# Altium PCB 1712.PcbDoc
Units mm, origin at the board's own origin, x right, y up, seen from the top; angles counter-clockwise.
Board outline 98.83 x 137.39 mm, 4 copper layers (ANALOG, GND, POWER, DIGITAL), stack 0.778 mm thick; 20 components, 53 nets, 252 pads, 0 vias.
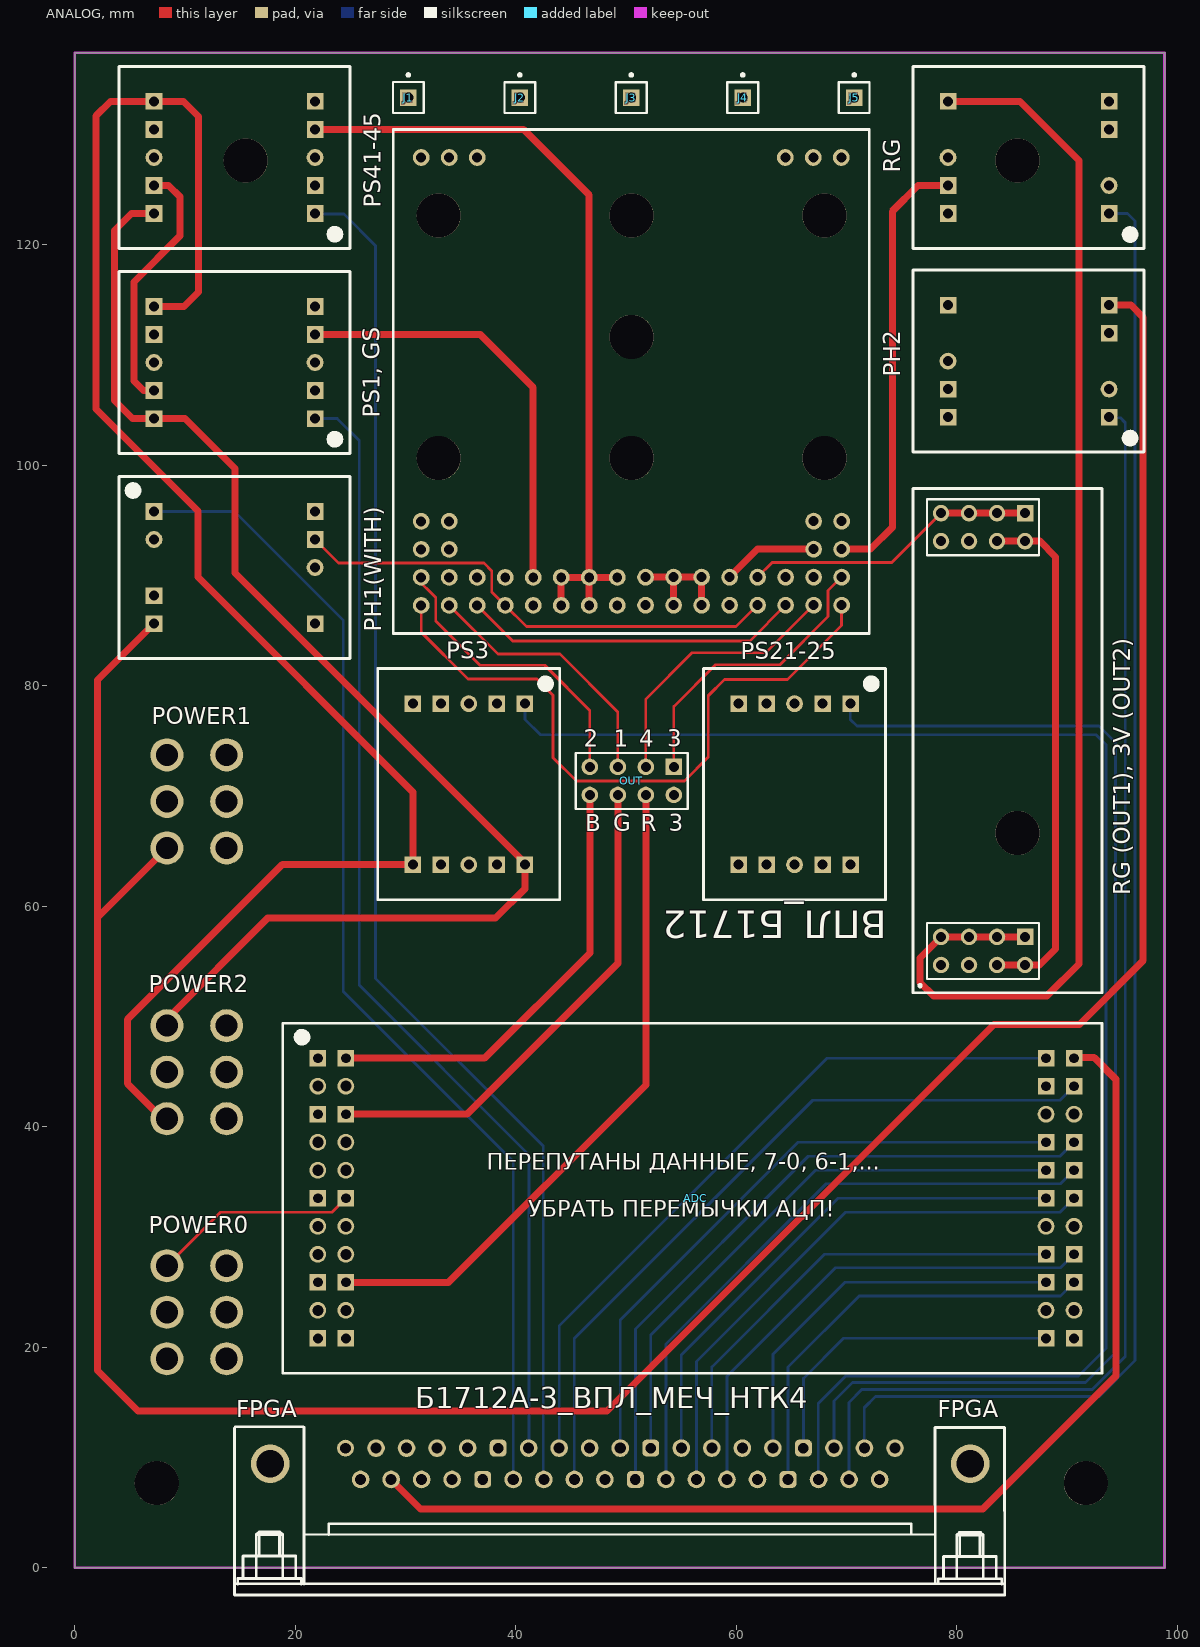
[diagram p0: ANALOG view]
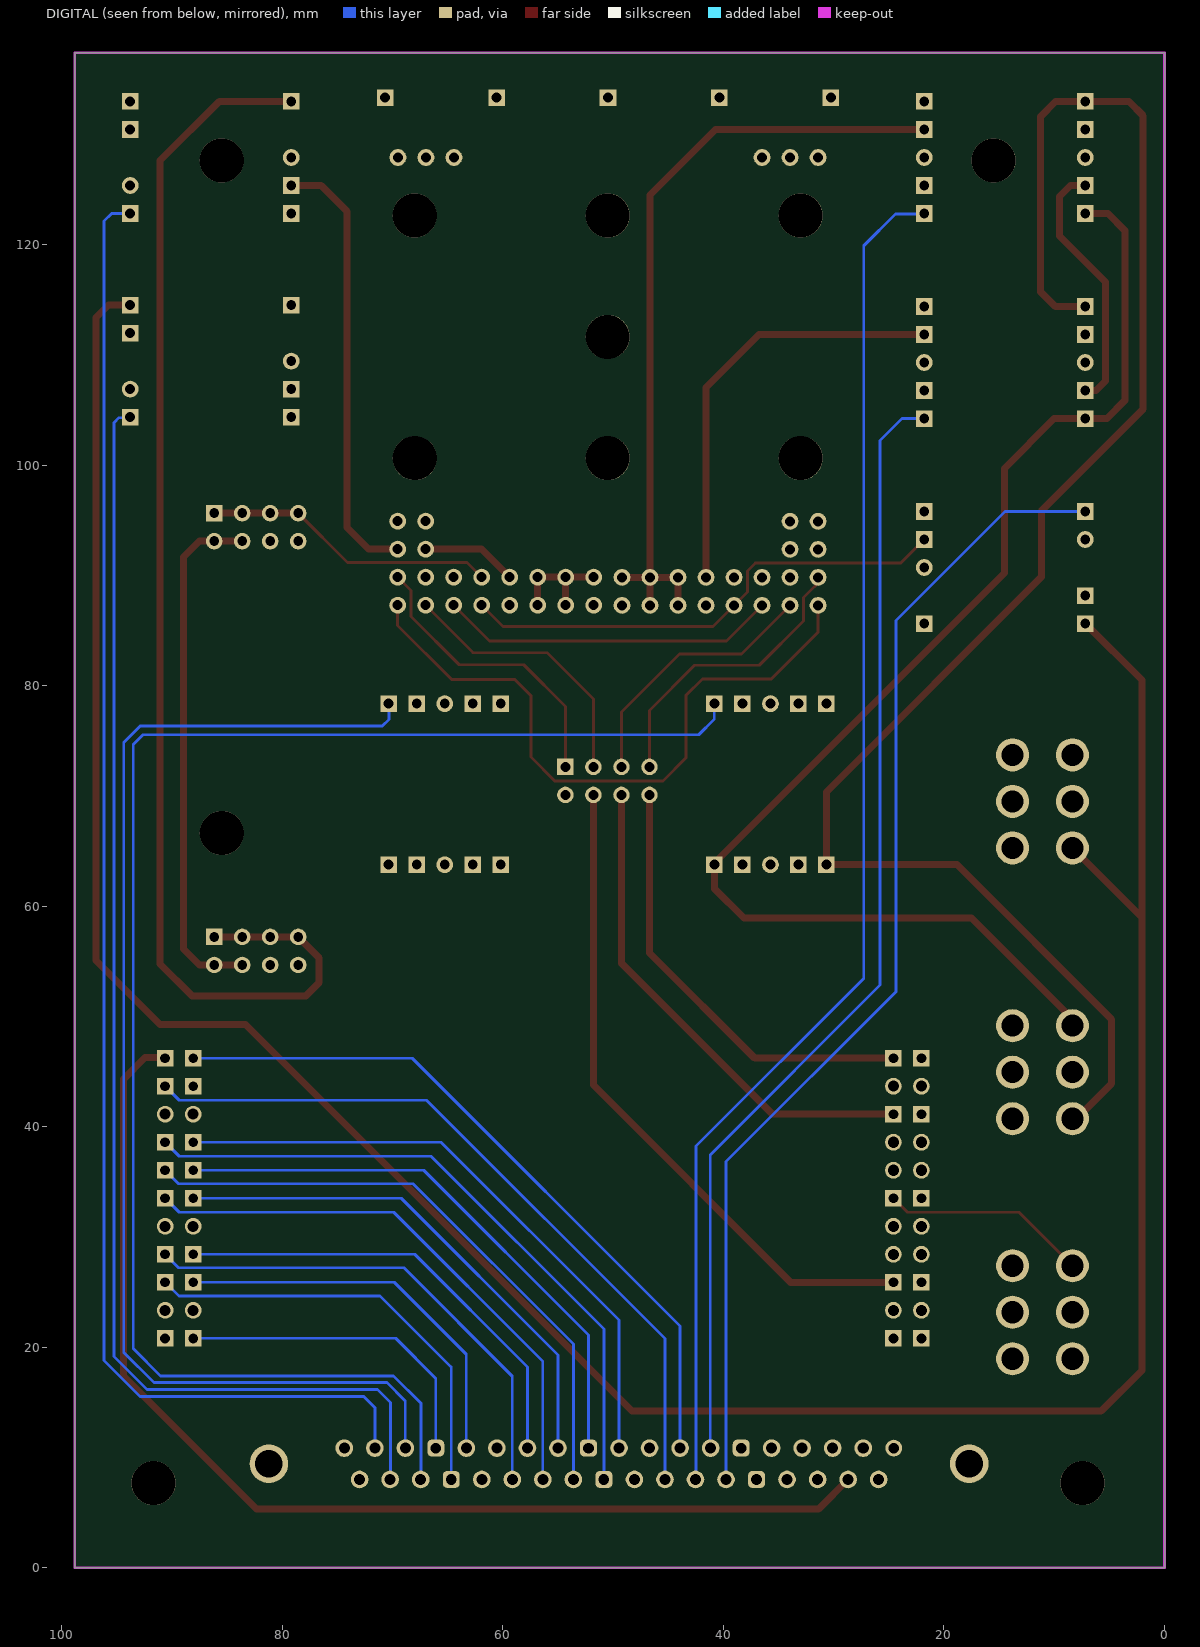
[diagram p1: DIGITAL view, seen from below]
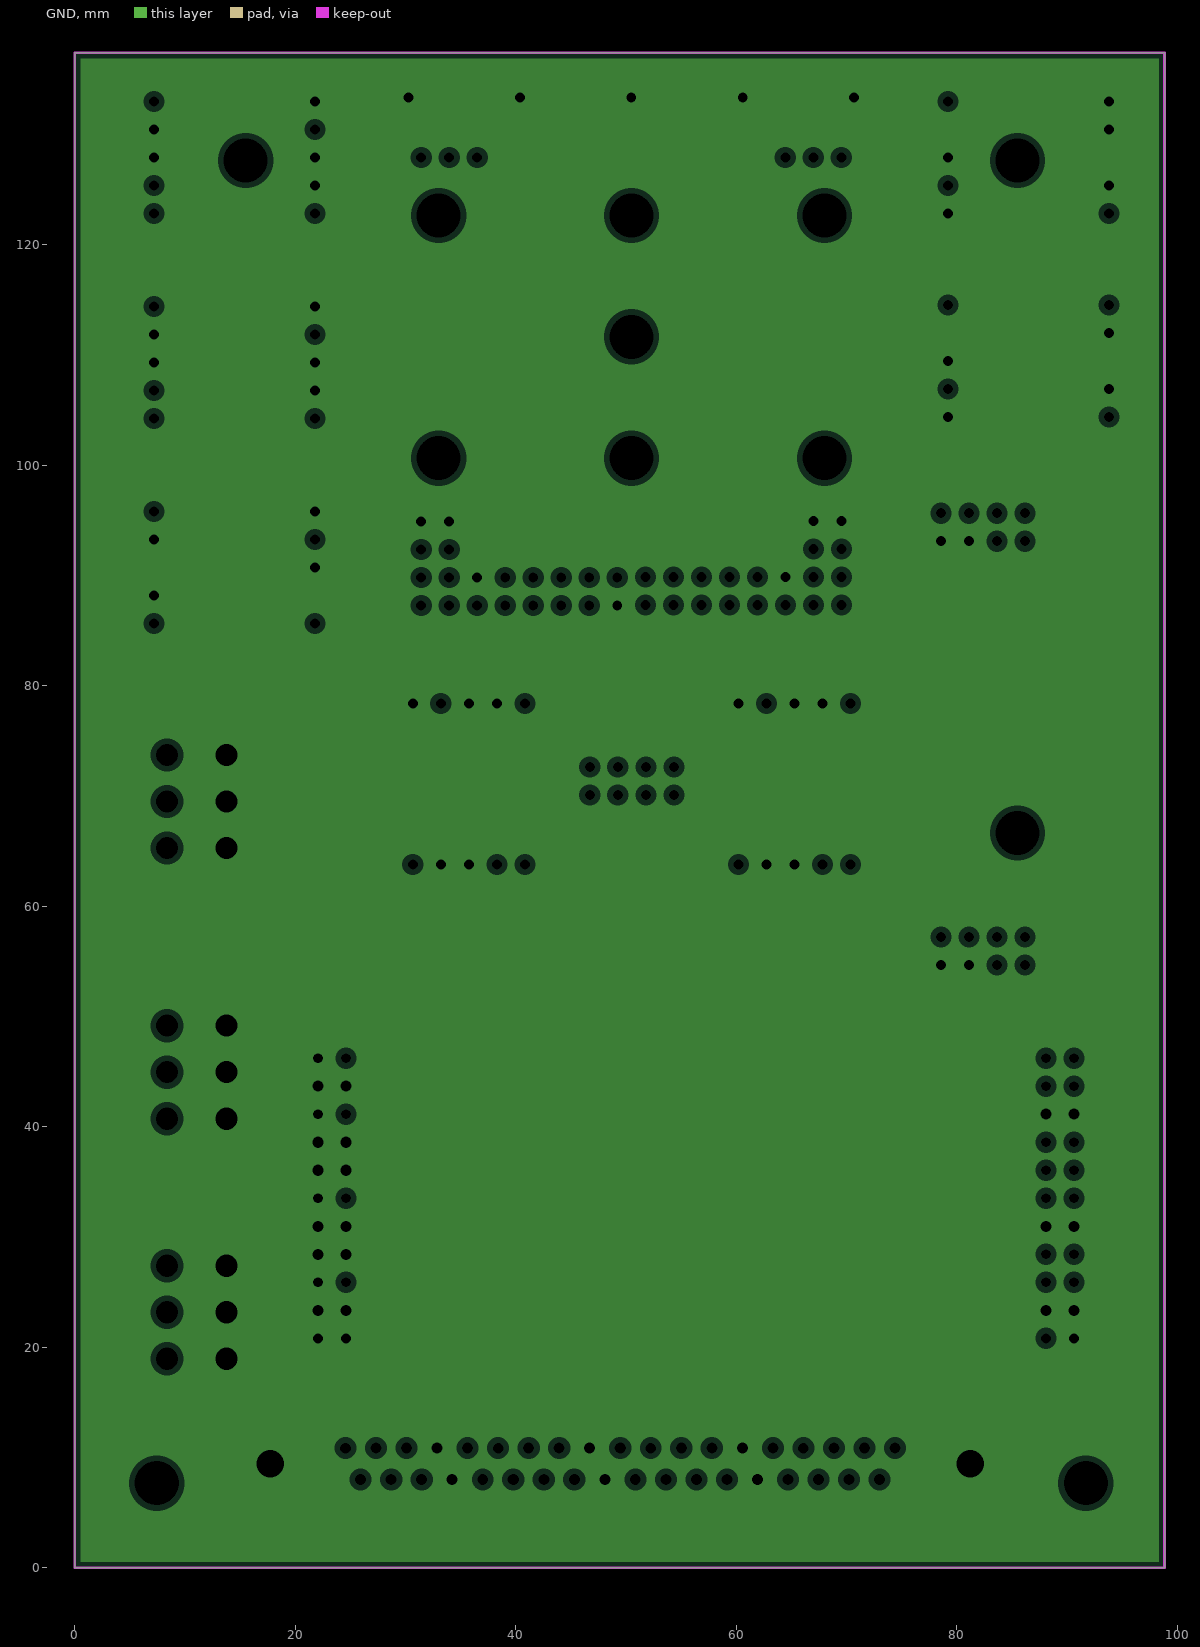
[diagram p2: GND, clearances drawn from the general rule]
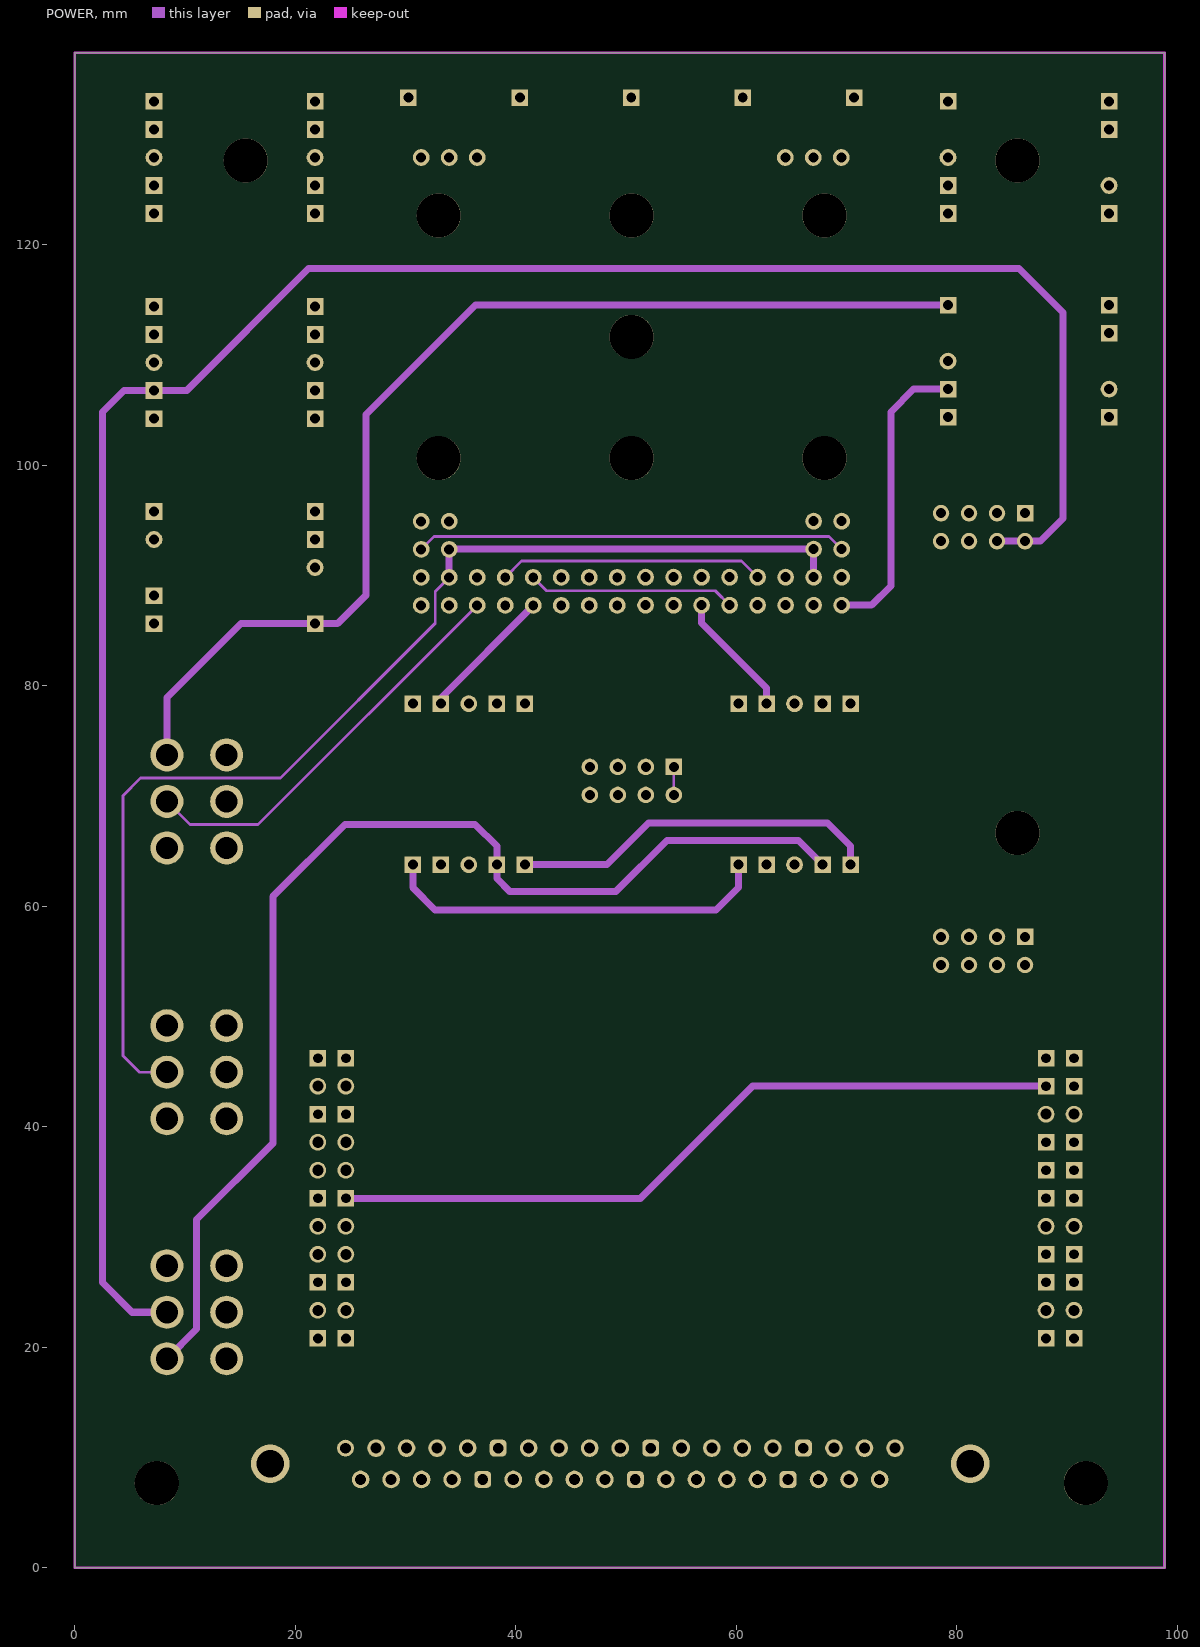
[diagram p3: POWER]

## Layer stack, top to bottom
Top Solder: solder mask 0.0102, Solder Resist, Dk 3.5
ANALOG: signal copper 0.0356
Dielectric 1: core 0.254, FR-4, Dk 4.2
GND: plane copper 0.036, net GND
Dielectric 4: prepreg 0.127, Dk 4.2
POWER: signal copper 0.036
Dielectric 3: core 0.254, Dk 4.2
DIGITAL: signal copper 0.0356
Bottom Solder: solder mask 0.0102, Solder Resist, Dk 3.5

## Board outline
0,0 98.831,0 98.831,137.389 0,137.389

## Design rules (kind name [scope] priority, off if disabled: settings)
Clearance [All] p1: gap=0.254
PlaneClearance [All] p1: clearance=0.508
PlaneConnect [All] p1: planeconnectstyle=Relief reliefexpansion=0.508 reliefentries=4 reliefconductorwidth=0.254 reliefairgap=0.254
PolygonConnect [All] p1: connectstyle=Relief reliefconductorwidth=0.254 reliefentries=4 polygonreliefangle="90 Angle" airgapwidth=0.254
RoutingVias [All] p1: holewidth=0.711 width=1.27 viastyle="Through Hole" minholewidth=0.711 minwidth=1.27 maxholewidth=0.711 maxwidth=1.27
SolderMaskExpansion [All] p1: expansion=0.102
Width [All] p1: maxlimit=2.254 minlimit=0.254 preferedwidth=0.254
27 further rules are at their usual default settings.

## Components (designator, comment, footprint, x,y, rotation, side; value= is the part's Value field where it differs from the comment)
ADC "MEZON_ADC" MEZON_ADC 22.047,46.203 r0 top
FPGA "CHEAP_CON_37_FEMALE" CHEAP_CONN_FEMALE 81.221,9.423 r180 top
J1 "Socket" PIN1 30.253,133.325 r0 top
J2 "Socket" PIN1 40.361,133.322 r0 top
J3 "Socket" PIN1 50.47,133.322 r0 top
J4 "Socket" PIN1 60.578,133.322 r0 top
J5 "Socket" PIN1 70.687,133.322 r0 top
OUT "Header 4X2" HDR2X4 54.331,72.619 r180 top
PH1(WITH) "MEZON_H" MEZON_H 7.188,95.783 r0 top
PH2 "MEZON_H" MEZON_H 93.802,104.343 r180 top
POWER0 "POWER" POWER 15.977,23.165 r90 top
POWER1 "POWER" POWER 15.977,69.494 r90 top
POWER2 "POWER" POWER 15.977,44.933 r90 top
"PS1, GS" "MEZON_V+15" MEZON_V 21.793,104.216 r180 top
PS3 "MEZON_V" MEZON_V 40.818,78.359 r270 top
PS21-25 "MEZON_V" MEZON_V 70.358,78.359 r270 top
PS41-45 "MEZON_V+15" MEZON_V 21.793,122.809 r180 top
RG "MEZON_H" MEZON_H 93.802,122.809 r180 top
"RG (OUT1), 3V (OUT2)" "MEZ_POWER" MEZON_POWER_NEW 78.562,54.661 r90 top
Б1712А-3_ВПЛ_МЕЧ_НТК4 "Б1712А-3" Dzr_place 31.42,127.889 r0 top (schematic designator 1712)

## Footprints (in the part's own frame and the unit in brackets; to place one, negate y for a bottom-side part, rotate by r counter-clockwise, add the part's x,y. Pads: shape width x height; smd on the part's side, far side on the other; paste and mask are expansions set on the pad)
CHEAP_CONN_FEMALE [mm] "CHEAP_CONN_FEMALE"
  round 1.6 hole 1: 1(6.833,-1.422) 2(9.601,-1.422) 3(12.37,-1.422) 5(17.907,-1.422) 6(20.676,-1.422) 7(23.444,-1.422) 8(26.213,-1.422) 10(31.75,-1.422) 11(34.519,-1.422) 12(37.287,-1.422) 13(40.056,-1.422) 15(45.593,-1.422) 16(48.362,-1.422) 17(51.13,-1.422) 18(53.899,-1.422) 20(8.23,1.422) 21(10.998,1.422) 22(13.767,1.422) 24(19.304,1.422) 25(22.073,1.422) 26(24.841,1.422) 27(27.61,1.422) 29(33.147,1.422) 30(35.916,1.422) 31(38.684,1.422) 32(41.453,1.422) 34(46.99,1.422) 35(49.759,1.422) 36(52.527,1.422) 37(55.296,1.422)
  rrect50% 1.524x1.524 hole 0.965: 4(15.138,-1.422) 9(28.981,-1.422) 14(42.824,-1.422) 23(16.535,1.422) 28(30.378,1.422) 33(44.221,1.422)
  round 1.524 hole 0.965: 19(56.667,-1.422)
  round 3.5 hole 2.5: 38(0,0) 39(63.5,0)
  silkscreen extent -3.11,-3.36 66.72,11.92
Dzr_place [mil]
  round 60 hole 35.43: P1(1501.14,-1298.36) P2(1401.14,-1298.36) P15(100,-1299.21) P16(0,-1299.21) R1(1501.14,-1398.36) R2(1401.14,-1398.36) R15(100,-1399.21) R16(0,-1399.21) S1(1501.14,-1498.36) S2(1401.14,-1498.36) S3(1301.14,-1498.36) S4(1201.14,-1498.36) S5(1101.14,-1498.36) S6(1001.14,-1498.36) S7(901.14,-1498.36) S8(801.14,-1498.36) S9(700,-1499.21) S10(600,-1499.21) S11(500,-1499.21) S12(400,-1499.21) S13(300,-1499.21) S14(200,-1499.21) S15(100,-1499.21) S16(0,-1499.21) T1(1501.14,-1598.36) T2(1401.14,-1598.36) T3(1301.14,-1598.36) T4(1201.14,-1598.36) T5(1101.14,-1598.36) T6(1001.14,-1598.36) T7(901.14,-1598.36) T9(700,-1599.21) T10(600,-1599.21) T11(500,-1599.21) T12(400,-1599.21) T13(300,-1599.21) T14(200,-1599.21) T15(100,-1599.21) T16(0,-1599.21) ""(0,0) ""(100,0) ""(200,0) ""(801.14,-1598.36) ""(1300,0) ""(1400,0) ""(1500,0)
  silkscreen extent -100,-1700 1600,100
HDR2X4 [mm] "Connector; Header; 4x2 Position"
  rect 1.5x1.5 hole 0.9: 1(0,0)
  round 1.5 hole 0.9: 2(0,2.54) 3(2.54,0) 4(2.54,2.54) 5(5.08,0) 6(5.08,2.54) 7(7.62,0) 8(7.62,2.54)
  silkscreen extent -1.27,-1.27 8.89,3.81
MEZON_ADC [mm] "MEZON_ADC"
  rect 1.5x1.5 hole 0.9: 1(0,0) 2(2.54,0) 5(0,-5.08) 6(2.54,-5.08) 11(0,-12.7) 12(2.54,-12.7) 17(0,-20.32) 18(2.54,-20.32) 21(0,-25.4) 22(2.54,-25.4) 23(66.04,-25.4) 24(68.58,-25.4) 27(66.04,-20.32) 28(68.58,-20.32) 29(66.04,-17.78) 30(68.58,-17.78) 33(66.04,-12.7) 34(68.58,-12.7) 35(66.04,-10.16) 36(68.58,-10.16) 37(66.04,-7.62) 38(68.58,-7.62) 41(66.04,-2.54) 42(68.58,-2.54) 43(66.04,0) 44(68.58,0)
  round 1.524 hole 1: 3(0,-2.54) 4(2.54,-2.54) 7(0,-7.62) 8(2.54,-7.62) 9(0,-10.16) 10(2.54,-10.16) 13(0,-15.24) 14(2.54,-15.24) 15(0,-17.78) 16(2.54,-17.78) 19(0,-22.86) 20(2.54,-22.86) 25(66.04,-22.86) 26(68.58,-22.86) 31(66.04,-15.24) 32(68.58,-15.24) 39(66.04,-5.08) 40(68.58,-5.08)
  silkscreen extent -3.17,-28.58 71.12,3.17
MEZON_H [mm]
  rect 1.5x1.5 hole 0.9: 1(0,0) 3(0,-7.62) 4(0,-10.16) 5(14.605,-10.16) 7(14.605,-2.54) 8(14.605,0)
  round 1.524 hole 0.9: 2(0,-2.54) 6(14.605,-5.08)
  silkscreen extent -3.17,-13.33 17.78,3.17
MEZON_POWER_NEW [mm]
  round 1.5 hole 0.9: 1(0,0) 1(0,-2.54) 2(0,-5.08) 2(0,-7.62) 3(2.54,-2.54) 3(2.54,0) 3(2.54,-5.08) 4(38.43,-2.54) 4(38.43,0) 5(38.43,-7.62) 5(38.43,-5.08) 6(40.97,-5.08) 6(40.97,-2.54) 6(40.97,0)
  rect 1.5x1.5 hole 0.9: 3(2.54,-7.62) 6(40.97,-7.62)
  silkscreen extent -2.51,-14.6 43.21,2.54
MEZON_V [mm]
  rect 1.5x1.5 hole 0.9: 1(0,0) 2(0,-2.54) 4(0,-7.62) 5(0,-10.16) 6(14.605,-10.16) 7(14.605,-7.62) 9(14.605,-2.54) 10(14.605,0)
  round 1.524 hole 0.9: 3(0,-5.08) 8(14.605,-5.08)
  silkscreen extent -3.18,-13.33 17.78,3.18
PIN1 [mm] "Connector; Plug"
  rect 1.5x1.5 hole 0.9: 1(0,0)
  silkscreen extent -1.4,-1.4 1.4,2.17
POWER [mm] "POWER"
  round 3 hole 2: 1(4.217,7.62) 2(0,7.62) 3(-4.217,7.62) 4(4.217,2.198) 5(0,2.198) 6(-4.217,2.198)

## Part data
OUT: "Header, 4-Pin, Dual row"
"PS1, GS" PS41-45: library part MEZON_V_+15
"RG (OUT1), 3V (OUT2)": library part MEZON_POWER_NEW

## Free pads (board coordinates)
  round 4 hole 4 unplated mask+0: 0(7.442,7.671) 0(15.5,127.623) 0(33,100.623) 0(33,122.623) 0(50.5,100.623) 0(50.5,111.623) 0(50.5,122.623) 0(68,100.623) 0(68,122.623) 0(85.5,66.623) 0(85.5,127.623) 0(91.694,7.671)

## Nets (pads, with @x,y where several pads share a name; then routed paths per layer and width w, separated by ;. In a path a pad name is that pad's centre, name@x,y a point inside that pad or via, vN(x,y) a via of type N, cw(c..) or ccw(c..) an arc to the next point about the centre after c; other vN are vias at no path point)
1V: "PS1, GS.10" POWER2.1 PS3.10 PS21-25.10 PS41-45.10 | length 153.8
  ANALOG w0.635: PS41-45.10 5.131,122.809 3.607,121.285 3.607,105.842 5.232,104.216 7.188,104.216 10.008,104.216 14.529,99.695 14.529,90.195 40.818,63.906 PS3.10 40.818,61.57 38.151,58.903 17.501,58.903 8.357,49.759 POWER2.1
  POWER w0.635: PS3.10 48.26,63.754 52.045,67.539 68.25,67.539 70.358,65.43 PS21-25.10
3V: "RG (OUT1), 3V (OUT2).6" Б1712А-3_ВПЛ_МЕЧ_НТК4.S4 Б1712А-3_ВПЛ_МЕЧ_НТК4.S13 | length 50.8
  ANALOG w0.254: Б1712А-3_ВПЛ_МЕЧ_НТК4.S4 63.259,91.161 74.092,91.161 78.562,95.631
  ANALOG w0.635: 78.562,95.631 81.102,95.631 83.642,95.631 86.182,95.631
  POWER w0.254: Б1712А-3_ВПЛ_МЕЧ_НТК4.S13 40.518,91.288 60.472,91.288 Б1712А-3_ВПЛ_МЕЧ_НТК4.S4
4V: PH1(WITH).5 PH2.5 POWER1.1 | length 100.4
  POWER w0.635: POWER1.1 8.357,78.918 15.062,85.623 21.793,85.623 23.851,85.623 26.416,88.189 26.416,104.572 36.347,114.503 PH2.5
-15V: POWER0.3 PS3.9 PS21-25.9 | length 105.5
  POWER w0.635: POWER0.3 11.049,21.64 11.049,31.572 17.958,38.481 17.958,60.858 24.511,67.412 36.297,67.412 38.278,65.43 PS3.9 38.278,62.484 39.421,61.341 49.098,61.341 53.696,65.938 65.634,65.938 PS21-25.9
ADCCLK: ADC.27 FPGA.5 | length 36
  DIGITAL w0.254: FPGA.5 63.322,10.854 63.322,19.355 69.85,25.883 ADC.27
CDSCLK1: ADC.23 FPGA.4 | length 29.8
  DIGITAL w0.254: FPGA.4 66.091,10.854 66.091,17.17 69.723,20.803 ADC.23
CDSCLK2: ADC.28 FPGA.23 | length 39.3
  DIGITAL w0.254: FPGA.23 64.694,8.009 64.694,18.186 71.145,24.638 89.383,24.638 ADC.28
D0: ADC.30 FPGA.25 | length 45.4
  DIGITAL w0.254: FPGA.25 59.148,17.365 68.986,27.203 89.408,27.203 ADC.30
D1: ADC.29 FPGA.7 | length 41.9
  DIGITAL w0.254: FPGA.7 57.777,18.204 67.996,28.423 ADC.29
D2: ADC.34 FPGA.26 | length 51.1
  DIGITAL w0.254: FPGA.26 56.38,18.712 69.901,32.233 89.357,32.233 ADC.34
D3: ADC.33 FPGA.8 | length 47.4
  DIGITAL w0.254: FPGA.8 55.008,19.296 69.215,33.503 ADC.33
D4: ADC.36 FPGA.27 | length 55.8
  DIGITAL w0.254: FPGA.27 53.611,20.286 68.148,34.823 89.408,34.823 ADC.36
D5: ADC.35 FPGA.9 | length 52.3
  DIGITAL w0.254: FPGA.9 52.24,21.099 67.183,36.043 ADC.35
D6: ADC.38 FPGA.28 | length 60.4
  DIGITAL w0.254: FPGA.28 50.843,21.633 66.523,37.313 89.357,37.313 ADC.38
D7: ADC.37 FPGA.10 | length 56.9
  DIGITAL w0.254: FPGA.10 49.471,22.445 65.608,38.583 ADC.37
GND: "PS1, GS.2" "PS1, GS.3" "PS1, GS.5" "PS1, GS.7" "PS1, GS.8" "RG (OUT1), 3V (OUT2).1" "RG (OUT1), 3V (OUT2).4" ADC.1 ADC.3 ADC.4 ADC.5 ADC.7 ADC.8 ADC.9 ADC.10 ADC.11 ADC.13 ADC.14 ADC.15 ADC.16 ADC.17 ADC.19 ADC.20 ADC.21 ADC.22 ADC.24 ADC.25 ADC.26 ADC.31 ADC.32 ADC.39 ADC.40 FPGA.6 FPGA.11 FPGA.16 FPGA.24 FPGA.29 FPGA.34 FPGA.38 FPGA.39 J1.1 J2.1 J3.1 J4.1 J5.1 PH1(WITH).2 PH1(WITH).3 PH1(WITH).6 PH1(WITH).8 PH2.2 PH2.3 PH2.6 PH2.8 POWER0.4 POWER0.5 POWER0.6 POWER1.4 POWER1.5 POWER1.6 POWER2.4 POWER2.5 POWER2.6 PS3.2 PS3.3 PS3.5 PS3.7 PS3.8 PS21-25.2 PS21-25.3 PS21-25.5 PS21-25.7 PS21-25.8 PS41-45.2 PS41-45.3 PS41-45.5 PS41-45.7 PS41-45.8 RG.2 RG.3 RG.4 RG.6 RG.8 Б1712А-3_ВПЛ_МЕЧ_НТК4.P1 Б1712А-3_ВПЛ_МЕЧ_НТК4.P2 Б1712А-3_ВПЛ_МЕЧ_НТК4.P15 Б1712А-3_ВПЛ_МЕЧ_НТК4.P16 Б1712А-3_ВПЛ_МЕЧ_НТК4.S3 Б1712А-3_ВПЛ_МЕЧ_НТК4.S14 Б1712А-3_ВПЛ_МЕЧ_НТК4.T9
GS_PS1: "PS1, GS.4" Б1712А-3_ВПЛ_МЕЧ_НТК4.S12 Б1712А-3_ВПЛ_МЕЧ_НТК4.T5 | length 57.9
  ANALOG w0.635: 21.793,111.836 36.779,111.836 41.58,107.036 Б1712А-3_ВПЛ_МЕЧ_НТК4.S12
  POWER w0.254: Б1712А-3_ВПЛ_МЕЧ_НТК4.S12 42.794,88.595 58.084,88.595 Б1712А-3_ВПЛ_МЕЧ_НТК4.T5
OUT1: OUT.5 Б1712А-3_ВПЛ_МЕЧ_НТК4.T15 | length 24.3
  ANALOG w0.254: Б1712А-3_ВПЛ_МЕЧ_НТК4.T15 38.374,82.855 43.993,82.855 49.251,77.597 OUT.5
OUT2: OUT.7 Б1712А-3_ВПЛ_МЕЧ_НТК4.S16 | length 27.7
  ANALOG w0.254: Б1712А-3_ВПЛ_МЕЧ_НТК4.S16 30.906,89.809 32.741,87.975 32.741,85.852 36.754,81.839 42.621,81.839 46.711,77.749 OUT.7
OUT3: OUT.1 OUT.2 Б1712А-3_ВПЛ_МЕЧ_НТК4.S1 | length 29.5
  ANALOG w0.254: OUT.1 54.331,78.105 58.115,81.89 63.957,81.89 68.326,86.258 68.326,88.608 Б1712А-3_ВПЛ_МЕЧ_НТК4.S1
  POWER w0.254: OUT.2 OUT.1
OUT4: OUT.3 Б1712А-3_ВПЛ_МЕЧ_НТК4.T2 | length 24.9
  ANALOG w0.254: OUT.3 51.791,78.765 56.007,82.982 62.7,82.982 Б1712А-3_ВПЛ_МЕЧ_НТК4.T2
P0.0: FPGA.15
P0.1: FPGA.33
P0.2: FPGA.14
P0.3: FPGA.32 PH1(WITH).1 | length 105.5
  DIGITAL w0.254: 7.188,95.783 14.478,95.783 24.359,85.903 24.359,52.232 39.768,36.823 FPGA.32
P0.4: "PS1, GS.1" FPGA.13 | length 102.6
  DIGITAL w0.254: 21.793,104.216 23.8,104.216 25.806,102.21 25.806,52.832 41.199,37.44 41.199,10.879 FPGA.13
P0.5: FPGA.31 PS41-45.1 | length 124.9
  DIGITAL w0.254: PS41-45.1 21.844,122.758 24.409,122.758 27.28,119.888 27.28,53.442 42.494,38.228 42.494,8.044 FPGA.31
P2.3: FPGA.22 PS3.1 | length 144.9
  DIGITAL w0.254: PS3.1 40.843,78.334 40.843,76.937 42.24,75.54 92.627,75.54 93.523,74.643 93.523,19.878 91.039,17.394 69.921,17.394 67.437,14.91 67.437,8.018 FPGA.22
P2.4: FPGA.3 PS21-25.1 | length 113.3
  DIGITAL w0.254: FPGA.3 68.859,10.854 68.859,15.113 70.529,16.783 91.65,16.783 94.386,19.52 94.386,74.828 92.888,76.327 70.942,76.327 70.333,76.937 70.333,78.334 PS21-25.1
P2.5: FPGA.21 PH2.1 | length 120.2
  DIGITAL w0.254: FPGA.21 70.206,8.018 70.206,14.986 71.374,16.154 92.278,16.154 95.275,19.152 95.275,103.835 94.818,104.292 93.853,104.292 PH2.1
P2.6: FPGA.2 RG.1 | length 136
  DIGITAL w0.254: FPGA.2 71.603,10.863 71.603,14.503 72.625,15.526 92.907,15.526 96.164,18.783 96.164,122.123 95.479,122.809 RG.1 RG.1@93.828,122.784
P2.7: FPGA.20
PFI2: FPGA.17
PFI3: FPGA.35
PH1: PH1(WITH).7 Б1712А-3_ВПЛ_МЕЧ_НТК4.T4 Б1712А-3_ВПЛ_МЕЧ_НТК4.T13 | length 45.3
  ANALOG w0.254: 21.793,93.243 23.927,91.11 37.109,91.11 37.821,90.399 37.821,88.488 Б1712А-3_ВПЛ_МЕЧ_НТК4.T13 40.965,85.344 59.982,85.344 Б1712А-3_ВПЛ_МЕЧ_НТК4.T4
PH2: PH2.7 Б1712А-3_ВПЛ_МЕЧ_НТК4.T1 Б1712А-3_ВПЛ_МЕЧ_НТК4.T16 | length 87.4
  ANALOG w0.254: Б1712А-3_ВПЛ_МЕЧ_НТК4.T16 31.42,84.836 35.662,80.594 41.91,80.594 43.383,79.121 43.383,73.457 45.491,71.349 55.296,71.349 57.455,73.508 57.455,79.07 58.928,80.543 64.643,80.543 69.549,85.449 Б1712А-3_ВПЛ_МЕЧ_НТК4.T1
  POWER w0.635: Б1712А-3_ВПЛ_МЕЧ_НТК4.T1 72.279,87.291 74.016,89.027 74.016,104.826 76.073,106.883 PH2.7
POWER_ADC: ADC.12 ADC.41 POWER0.1 | length 86.5
  ANALOG w0.254: POWER0.1 13.207,32.233 23.317,32.233 ADC.12
  POWER w0.635: ADC.12 51.308,33.503 61.468,43.663 ADC.41
POWER_PH_LOW: PH1(WITH).4 PH2.4 POWER1.3 | length 254.7
  ANALOG w0.635: 7.188,85.623 2.057,80.493 2.057,58.978 ; POWER1.3@7.57,65.277 POWER1.3 2.057,58.978 ; PH2.4 95.783,114.503 96.901,113.386 96.901,55.067 91.11,49.276 83.363,49.276 48.285,14.199 5.74,14.199 2.057,17.882 2.057,58.978
POWER_PS_LOW: "PS1, GS.6" POWER2.3 PS3.6 PS21-25.6 PS41-45.6 | length 188.5
  ANALOG w0.635: 7.188,114.376 9.906,114.376 11.227,115.697 11.227,131.623 9.881,132.969 PS41-45.6 3.226,132.969 1.93,131.674 1.93,105.08 11.176,95.834 11.176,89.84 30.658,70.358 PS3.6 18.821,63.754 4.801,49.733 4.801,43.891 7.977,40.715 POWER2.3
  POWER w0.635: PS3.6 30.658,61.671 32.69,59.639 58.141,59.639 60.198,61.697 PS21-25.6
POWER_RD: POWER1.2 Б1712А-3_ВПЛ_МЕЧ_НТК4.T3 Б1712А-3_ВПЛ_МЕЧ_НТК4.T14 | length 67.9
  ANALOG w0.254: Б1712А-3_ВПЛ_МЕЧ_НТК4.T14 39.72,84.049 61.227,84.049 Б1712А-3_ВПЛ_МЕЧ_НТК4.T3
  POWER w0.254: POWER1.2 10.465,67.386 16.617,67.386 Б1712А-3_ВПЛ_МЕЧ_НТК4.T14
POWER_RG: "RG (OUT1), 3V (OUT2).3" RG.5 | length 115.6
  ANALOG w0.635: RG.5 85.725,132.969 91.084,127.61 91.084,54.762 88.189,51.867 77.876,51.867 76.657,53.086 76.657,55.296 78.562,57.201 81.102,57.201 83.642,57.201 86.182,57.201
POWER_VDD_PD: POWER2.2 Б1712А-3_ВПЛ_МЕЧ_НТК4.R2 Б1712А-3_ВПЛ_МЕЧ_НТК4.R15 Б1712А-3_ВПЛ_МЕЧ_НТК4.S2 Б1712А-3_ВПЛ_МЕЧ_НТК4.S5 Б1712А-3_ВПЛ_МЕЧ_НТК4.S15 | length 114.5
  ANALOG w0.635: Б1712А-3_ВПЛ_МЕЧ_НТК4.S5 61.929,92.371 Б1712А-3_ВПЛ_МЕЧ_НТК4.R2
  POWER w0.254: POWER2.2 5.867,44.933 4.369,46.431 4.369,70.002 5.969,71.603 18.644,71.603 32.69,85.649 32.69,88.539 Б1712А-3_ВПЛ_МЕЧ_НТК4.S15
  POWER w0.635: Б1712А-3_ВПЛ_МЕЧ_НТК4.S15 Б1712А-3_ВПЛ_МЕЧ_НТК4.R15 33.981,92.371 Б1712А-3_ВПЛ_МЕЧ_НТК4.R2 Б1712А-3_ВПЛ_МЕЧ_НТК4.S2
PS3: PS3.4 Б1712А-3_ВПЛ_МЕЧ_НТК4.T12 | length 12.4
  POWER w0.635: PS3.4 33.198,78.887 Б1712А-3_ВПЛ_МЕЧ_НТК4.T12
PS21-25: PS21-25.4 Б1712А-3_ВПЛ_МЕЧ_НТК4.S6 Б1712А-3_ВПЛ_МЕЧ_НТК4.S7 Б1712А-3_ВПЛ_МЕЧ_НТК4.S8 Б1712А-3_ВПЛ_МЕЧ_НТК4.T6 Б1712А-3_ВПЛ_МЕЧ_НТК4.T7 | length 21.5
  ANALOG w0.635: Б1712А-3_ВПЛ_МЕЧ_НТК4.S8 Б1712А-3_ВПЛ_МЕЧ_НТК4.S7 ; Б1712А-3_ВПЛ_МЕЧ_НТК4.T7 Б1712А-3_ВПЛ_МЕЧ_НТК4.S7 ; Б1712А-3_ВПЛ_МЕЧ_НТК4.T6 Б1712А-3_ВПЛ_МЕЧ_НТК4.S6 Б1712А-3_ВПЛ_МЕЧ_НТК4.S7
  POWER w0.635: Б1712А-3_ВПЛ_МЕЧ_НТК4.T6 56.849,85.671 62.738,79.781 PS21-25.4
PS41-45: PS41-45.4 Б1712А-3_ВПЛ_МЕЧ_НТК4.S9 Б1712А-3_ВПЛ_МЕЧ_НТК4.S10 Б1712А-3_ВПЛ_МЕЧ_НТК4.S11 Б1712А-3_ВПЛ_МЕЧ_НТК4.T10 Б1712А-3_ВПЛ_МЕЧ_НТК4.T11 | length 72.2
  ANALOG w0.635: PS41-45.4 40.716,130.429 46.66,124.485 Б1712А-3_ВПЛ_МЕЧ_НТК4.S10 ; Б1712А-3_ВПЛ_МЕЧ_НТК4.T11 Б1712А-3_ВПЛ_МЕЧ_НТК4.S11 Б1712А-3_ВПЛ_МЕЧ_НТК4.S10 ; Б1712А-3_ВПЛ_МЕЧ_НТК4.T10 Б1712А-3_ВПЛ_МЕЧ_НТК4.S10 ; Б1712А-3_ВПЛ_МЕЧ_НТК4.S9 Б1712А-3_ВПЛ_МЕЧ_НТК4.S10
RG: RG.7 Б1712А-3_ВПЛ_МЕЧ_НТК4.R1 Б1712А-3_ВПЛ_МЕЧ_НТК4.R16 | length 79.2
  ANALOG w0.635: Б1712А-3_ВПЛ_МЕЧ_НТК4.R1 72.178,92.371 74.143,94.336 74.143,123.012 76.479,125.349 RG.7
  POWER w0.254: Б1712А-3_ВПЛ_МЕЧ_НТК4.R16 32.594,93.523 68.397,93.523 Б1712А-3_ВПЛ_МЕЧ_НТК4.R1
SCLK: ADC.43 FPGA.12 | length 65.3
  DIGITAL w0.254: FPGA.12 43.934,21.912 68.224,46.203 ADC.43
SDATA: ADC.44 FPGA.36 | length 103.3
  ANALOG w0.635: FPGA.36 31.361,5.334 82.347,5.334 94.412,17.399 94.412,44.298 92.456,46.253 90.678,46.253 ADC.44
SLOAD: ADC.42 FPGA.30 | length 67.6
  DIGITAL w0.254: FPGA.30 45.305,20.769 66.929,42.393 89.357,42.393 ADC.42
"STAB (+15)": "PS1, GS.9" "RG (OUT1), 3V (OUT2).2" "RG (OUT1), 3V (OUT2).5" POWER0.2 PS41-45.9 | length 276.3
  ANALOG w0.635: 7.188,106.756 6.223,106.756 5.359,107.62 5.359,116.586 9.525,120.752 9.525,124.333 8.509,125.349 PS41-45.9 ; 83.642,54.661 86.182,54.661 87.503,54.661 88.951,56.109 88.951,91.669 87.528,93.091 86.182,93.091 83.642,93.091
  POWER w0.635: POWER0.2 5.207,23.165 2.515,25.857 2.515,104.8 4.47,106.756 7.188,106.756 10.16,106.756 21.209,117.805 85.649,117.805 89.637,113.817 89.637,95.148 87.579,93.091 86.182,93.091 83.642,93.091
VINB: ADC.2 OUT.8 | length 40.4
  ANALOG w0.635: ADC.2 37.16,46.203 46.711,55.753 OUT.8
VING: ADC.6 OUT.6 | length 45.6
  ANALOG w0.635: ADC.6 35.56,41.123 49.251,54.813 OUT.6
VINR: ADC.18 OUT.4 | length 60.9
  ANALOG w0.635: ADC.18 33.909,25.883 51.791,43.764 OUT.4
pads on no net: FPGA.1 FPGA.18 FPGA.19 FPGA.37 Б1712А-3_ВПЛ_МЕЧ_НТК4.

## Polygon pours and split planes (outlines as drawn)
GND on GND (split plane): 98.321,0.51 0.51,0.51 0.51,136.878 98.321,136.878

## Keep-outs
Keep-Out Layer:
  the board outline again, w0.254

## Silkscreen, mask and mechanical layers (free items; w line width, h text height)
Top Overlay:
  text "2" at 46.177,74.447 h1.52
  text "1" at 48.895,74.447 h1.52
  text "4" at 51.206,74.447 h1.52
  text "3" at 53.746,74.447 h1.52
  text "B" at 46.304,66.777 h1.52
  text "G" at 48.819,66.777 h1.52
  text "R" at 51.333,66.777 h1.52
  text "3" at 53.848,66.777 h1.52
  text "ВПЛ_Б1712" at 73.66,59.588 h2.52 r180
  text "ПЕРЕПУТАНЫ ДАННЫЕ, 7-0, 6-1,..." at 37.345,35.585 h2.52
  text "УБРАТЬ ПЕРЕМЫЧКИ АЦП!" at 41.138,31.344 h2.52
  text "FPGA" at 78.257,13.662 h1.52